# Altium PCB InputBoard_Analog+Digital.PcbDoc
Units mm, origin at the board's own origin, x right, y up, seen from the top; angles counter-clockwise.
Board outline 44 x 44 mm, 2 copper layers (Top Layer, Bottom Layer), stack 1.571 mm thick; 54 components, 45 nets, 200 pads, 44 vias.
Unrouted connection lines stored in the file: 12.
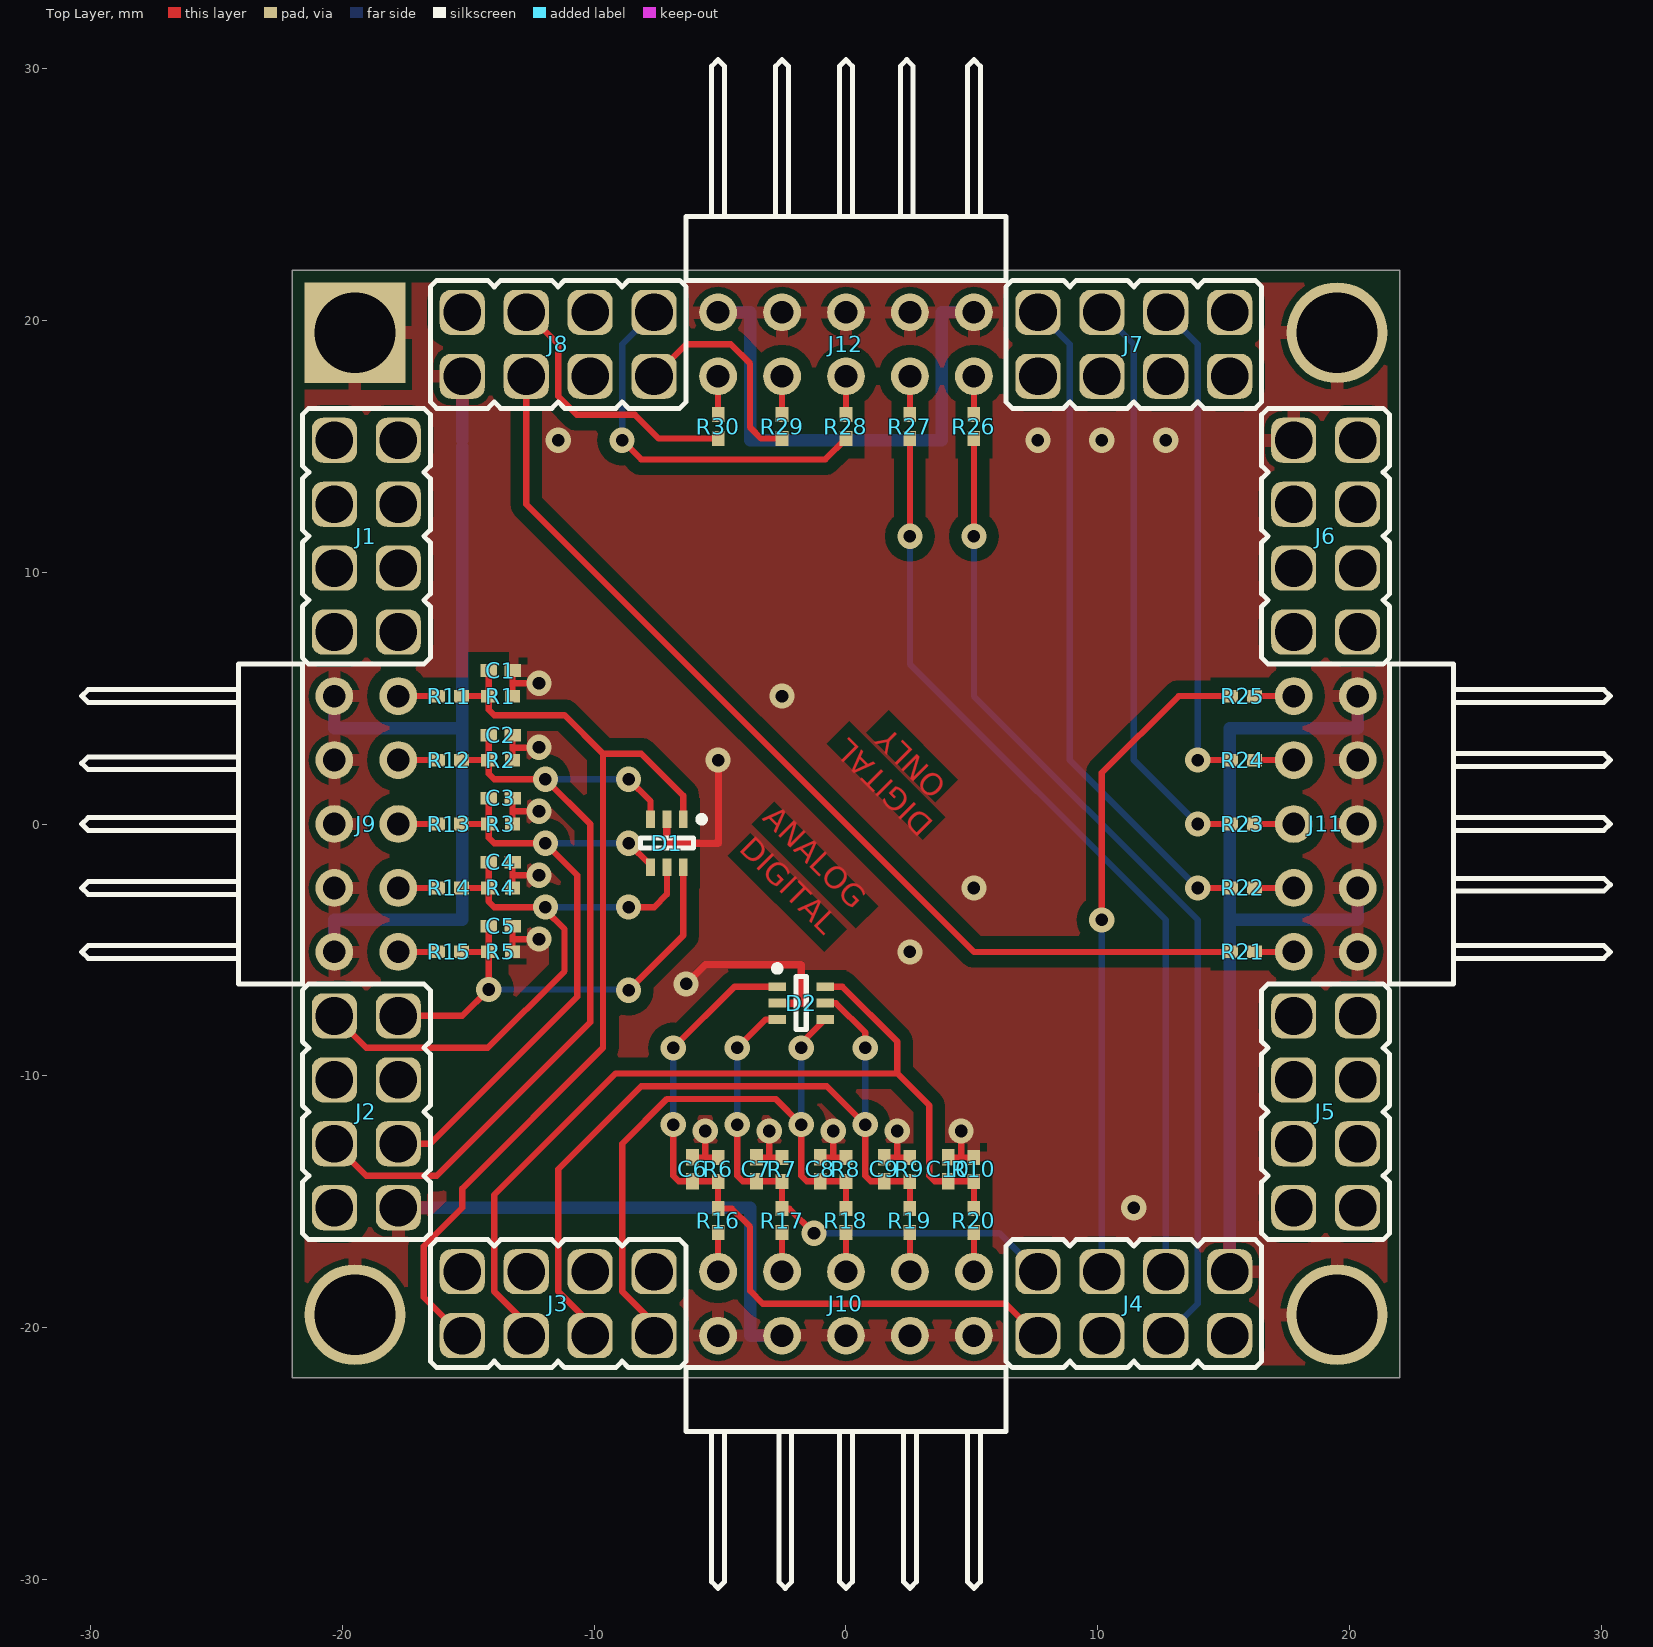
[diagram p0: Top Layer view]
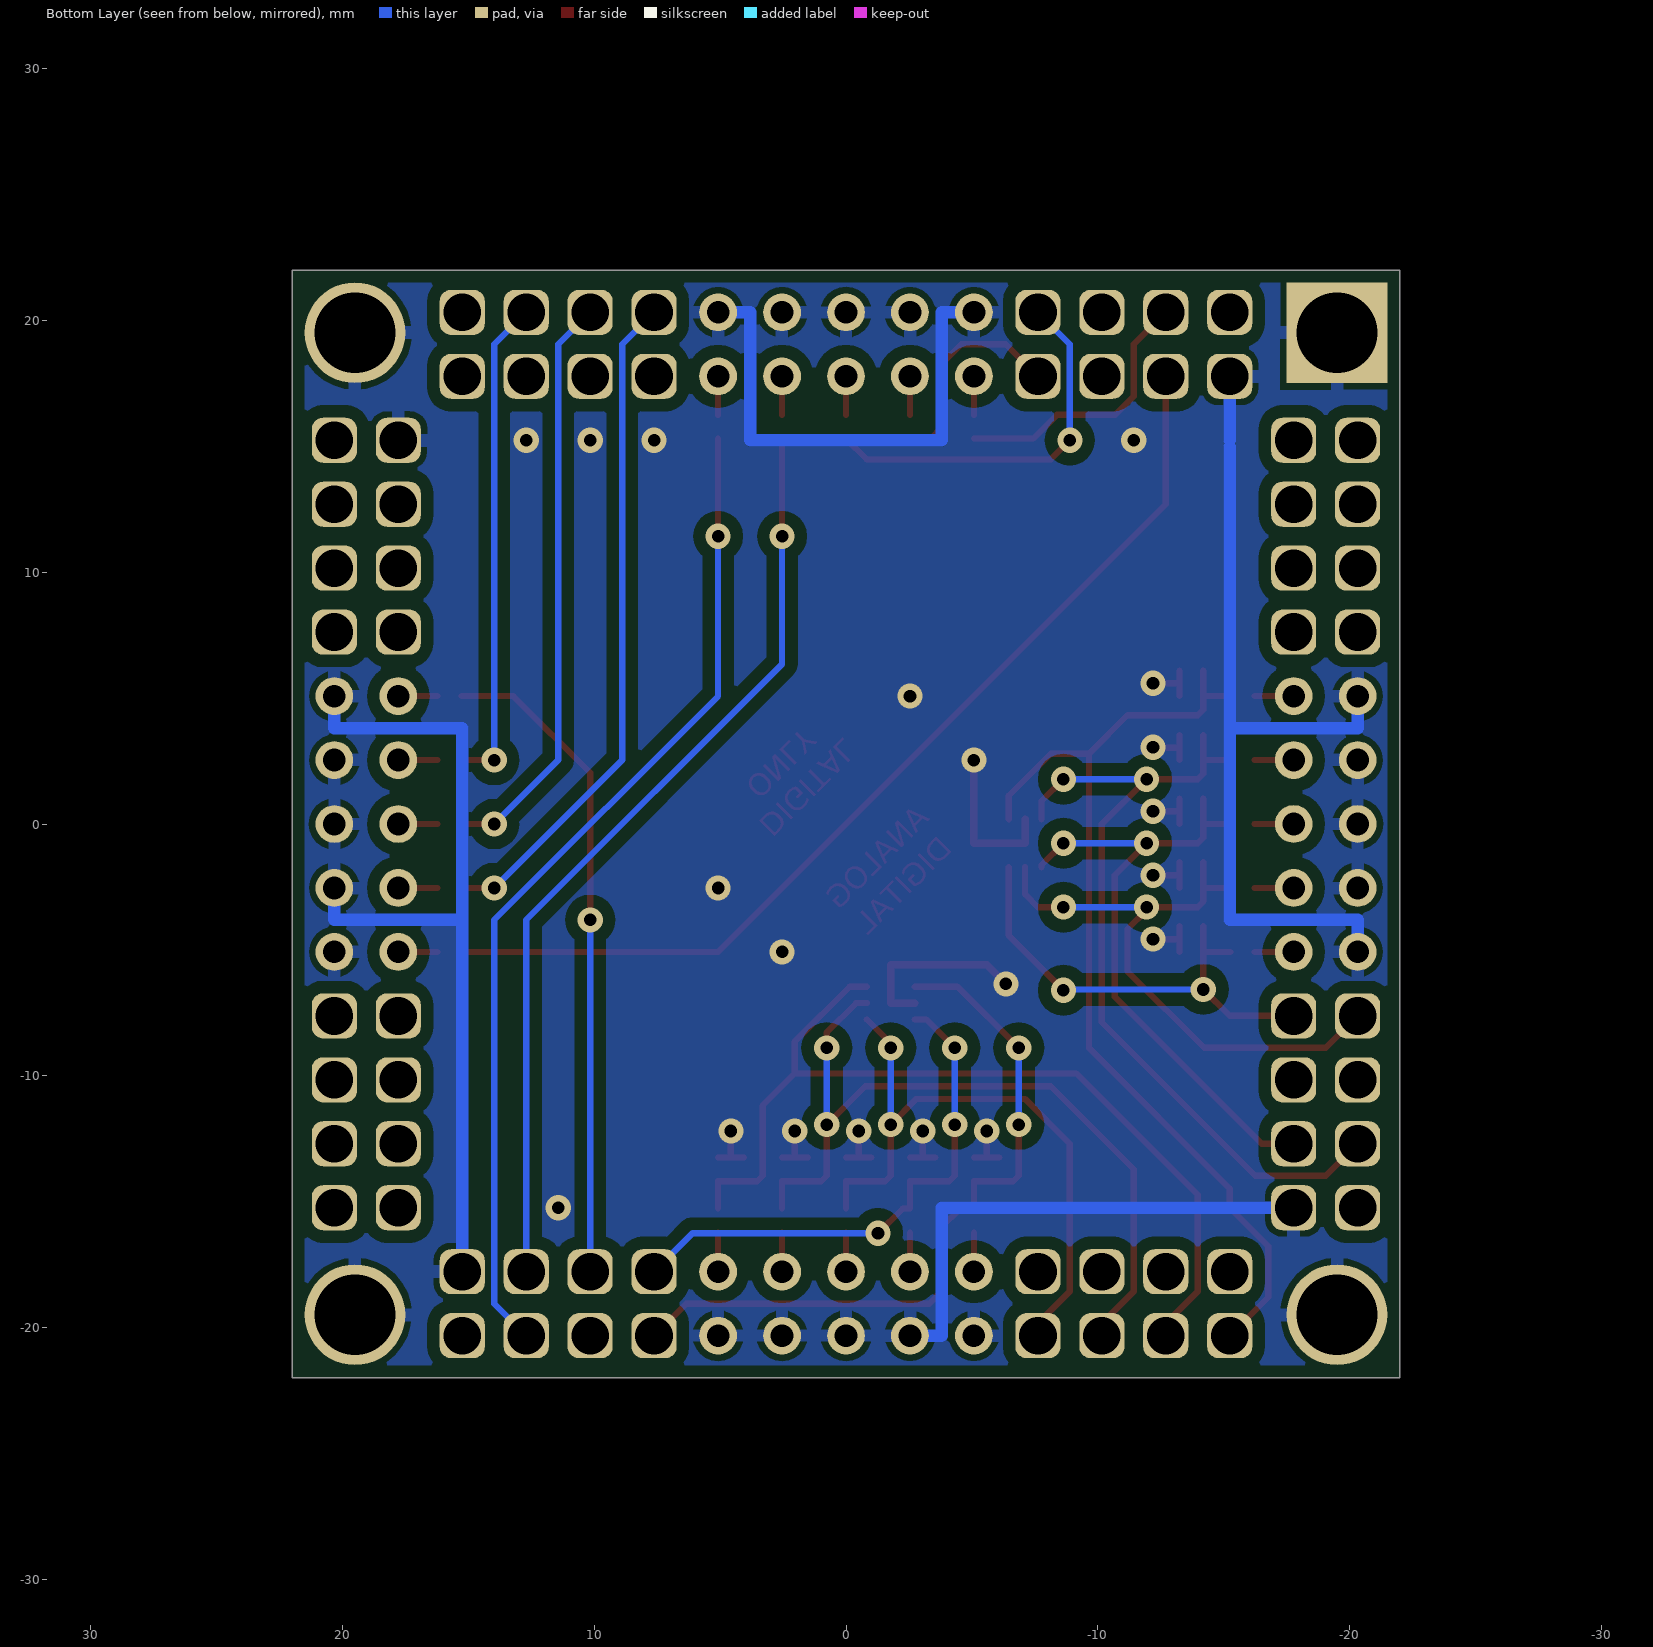
[diagram p1: Bottom Layer view, seen from below]

## Layer stack, top to bottom
Top Solder: solder mask 0.0102, Solder Resist, Dk 3.5
Top Layer: signal copper 0.0356
Dielectric 1: dielectric 1.5, FR-4, Dk 4.8
Bottom Layer: signal copper 0.0356
Bottom Solder: solder mask 0.0102, Solder Resist, Dk 3.5

## Board outline
-22,-22 -22,22 22,22 22,-22

## Design rules (kind name [scope] priority, off if disabled: settings)
Clearance Clearance_Text_Polygon(GND) [InPolygon and InNet('GND') vs IsText] p1: gap=0
Clearance Clearance_Track(GND)_Polygon(GND) [InPolygon and InNet('GND') vs IsTrack and InNet('GND')] p2: gap=0
Clearance Clearance_All_Polygon(GND) [InPolygon and InNet('GND')] p3: gap=0.5
Clearance [All] p4: gap=0.25
HoleSize [All] p1: absolutevalues=TRUE maxlimit=4 minlimit=0.3 maxpercent=80.000 minpercent=20.000
PolygonConnect PolygonConnect_Via(GND) [InNet('GND') vs IsVia] p1: connectstyle=Direct reliefconductorwidth=0.254 reliefentries=4 polygonreliefangle="90 Angle" airgapwidth=0.254
PolygonConnect [All] p2: connectstyle=Relief reliefconductorwidth=0.5 reliefentries=4 polygonreliefangle="90 Angle" airgapwidth=0.254
RoutingVias [All] p1: holewidth=0.5 width=1 viastyle="Through Hole" minholewidth=0.5 minwidth=1 maxholewidth=1.5 maxwidth=2
ShortCircuit ShortCircuit_Text_Polygon(GND) [IsText vs InPolygon and InNet('GND')] p1: allowed=TRUE
ShortCircuit [All] p2: allowed=FALSE
SolderMaskExpansion [All] p1: expansion=0.102
Width [All] p1: maxlimit=2 minlimit=0.25 preferedwidth=0.3
27 further rules are at their usual default settings.

## Components (designator, comment, footprint, x,y, rotation, side; value= is the part's Value field where it differs from the comment)
C1 "0.1/25" CAP0402 -13.716,6.096 r180 top
C2 "0.1/25" CAP0402 -13.716,3.523 r180 top
C3 "0.1/25" CAP0402 -13.716,1.016 r180 top
C4 "0.1/25" CAP0402 -13.716,-1.524 r180 top
C5 "0.1/25" CAP0402 -13.716,-4.064 r180 top
C6 "0.1/25" CAP0402 -6.096,-13.716 r270 top
C7 "0.1/25" CAP0402 -3.556,-13.716 r270 top
C8 "0.1/25" CAP0402 -1.016,-13.716 r270 top
C9 "0.1/25" CAP0402 1.524,-13.716 r270 top
C10 "0.1/25" CAP0402 4.064,-13.716 r270 top
D1 "SMF05C" SOT363 -7.112,-0.762 r270 top
D2 "SMF05C" SOT363 -1.778,-7.112 r0 top
J1 "LEFT" PBDM-8 -19.05,11.43 r270 top
J2 "LEFT" PBDM-8 -19.05,-11.43 r270 top
J3 "BOTTOM" PBDM-8 -11.43,-19.05 r0 top
J4 "BOTTOM" PBDM-8 11.43,-19.05 r0 top
J5 "RIGHT" PBDM-8 19.05,-11.43 r90 top
J6 "RIGHT" PBDM-8 19.05,11.43 r90 top
J7 "TOP" PBDM-8 11.43,19.05 r180 top
J8 "TOP" PBDM-8 -11.43,19.05 r180 top
J9 "PLD-10R" PLD-10R -19.05,0 r270 top
J10 "PLD-10R" PLD-10R 0,-19.05 r0 top
J11 "PLD-10R" PLD-10R 19.05,0 r90 top
J12 "PLD-10R" PLD-10R 0,19.05 r180 top
R1 "10k" RES0402 -13.716,5.08 r0 top
R2 "10k" RES0402 -13.716,2.54 r0 top
R3 "10k" RES0402 -13.716,0 r0 top
R4 "10k" RES0402 -13.716,-2.54 r0 top
R5 "10k" RES0402 -13.716,-5.08 r0 top
R6 "10k" RES0402 -5.08,-13.716 r90 top
R7 "10k" RES0402 -2.54,-13.716 r90 top
R8 "10k" RES0402 0,-13.716 r90 top
R9 "10k" RES0402 2.54,-13.716 r90 top
R10 "10k" RES0402 5.08,-13.716 r90 top
R11 "NC(1k)" RES0402 -15.748,5.08 r180 top
R12 "NC(1k)" RES0402 -15.748,2.54 r180 top
R13 "NC(1k)" RES0402 -15.748,0 r180 top
R14 "NC(1k)" RES0402 -15.748,-2.54 r180 top
R15 "NC(1k)" RES0402 -15.748,-5.08 r180 top
R16 "NC(1k)" RES0402 -5.08,-15.748 r270 top
R17 "NC(1k)" RES0402 -2.54,-15.748 r270 top
R18 "1k" RES0402 0,-15.748 r270 top
R19 "1k" RES0402 2.54,-15.748 r270 top
R20 "1k" RES0402 5.08,-15.748 r270 top
R21 "NC(1k)" RES0402 15.748,-5.08 r0 top
R22 "1k" RES0402 15.748,-2.54 r0 top
R23 "1k" RES0402 15.748,0 r0 top
R24 "1k" RES0402 15.748,2.54 r0 top
R25 "NC(1k)" RES0402 15.748,5.08 r0 top
R26 "NC(1k)" RES0402 5.08,15.781 r90 top
R27 "NC(1k)" RES0402 2.54,15.781 r90 top
R28 "NC(1k)" RES0402 0,15.781 r90 top
R29 "NC(1k)" RES0402 -2.54,15.781 r90 top
R30 "NC(1k)" RES0402 -5.08,15.781 r90 top

## Footprints (in the part's own frame and the unit in brackets; to place one, negate y for a bottom-side part, rotate by r counter-clockwise, add the part's x,y. Pads: shape width x height; smd on the part's side, far side on the other; paste and mask are expansions set on the pad)
CAP0402 [mm]
  rect 0.65x0.5 smd: 1(-0.475,0) 2(0.475,0)
  body extent -0.55,-0.3 0.55,0.3, height 0.5
PBDM-8 [mm] "5-pin interboard connector, pitch 2.54 mm"
  rrect50% 1.79x1.79 hole 1.5: 1(-3.81,-1.27) 2(-3.81,1.27) 3(-1.27,-1.27) 4(-1.27,1.27) 5(1.27,-1.27) 6(1.27,1.27) 7(3.81,-1.27) 8(3.81,1.27)
  silkscreen extent -5.08,-2.54 5.08,2.54, body extent -5.08,-2.54 5.08,2.54, height 3
PLD-10R [mm] "10-pin dual row (2x5) angle interboard connector, pitch 2.54 mm"
  round 1.5 hole 0.9: 1(-5.08,-1.27) 2(-5.08,1.27) 3(-2.54,-1.27) 4(-2.54,1.27) 5(0,-1.27) 6(0,1.27) 7(2.54,-1.27) 8(2.54,1.27) 9(5.08,-1.27) 10(5.08,1.27)
  silkscreen extent -6.35,-11.3 6.35,-2.54, body extent -6.35,-11.19 6.35,1.65, height 5.08
RES0402 [mm]
  rect 0.6x0.5 smd: 1(-0.475,0) 2(0.475,0)
  body extent -0.53,-0.28 0.53,0.28, height 0.35
SOT363 [mm] "SOT363 also known as SC-70 6L, SC-88"
  rect 0.7x0.35 smd: 1(-0.95,0.65) 2(-0.95,0) 3(-0.95,-0.65) 4(0.95,-0.65) 5(0.95,0) 6(0.95,0.65)
  silkscreen extent -1.07,-1.05 0.2,1.5, body extent -0.67,-1.05 0.67,1.05, height 1.1

## Part data
C1 C2 C3 C4 C5 C6 C7 C8 C9 C10: library part CAP0402, "Ceramic chip capacitor 0402"
D1 D2: "5-line TVS Array for ESD and Latch-Up Protection"
J1 J2 J3 J4 J5 J6 J7 J8: library part PBDM-8, "2x4-pin header, pitch 2.54 mm"
J9 J10 J11 J12: "2x5-pin angle header, pitch 2.54 mm"
R1 R2 R3 R4 R5 R6 R7 R8 R9 R10 R11 R12 R13 R14 R15 R16 R17 R18 R19 R20 R21 R22 R23 R24 R25 R26 R27 R28 R29 R30: library part RES0402, "Ceramic chip resistor"

## Free pads (board coordinates)
  round 4 hole 3.2: 0(-19.5,-19.491) 0(19.5,-19.491) 0(19.5,19.509)
  rect 4x4 hole 3.2: 0(-19.5,19.509)

## Via types
v1: diameter 1, hole 0.5, Top Layer to Bottom Layer, 44 vias

## Nets (pads, with @x,y where several pads share a name; then routed paths per layer and width w, separated by ;. In a path a pad name is that pad's centre, name@x,y a point inside that pad or via, vN(x,y) a via of type N, cw(c..) or ccw(c..) an arc to the next point about the centre after c; other vN are vias at no path point)
+5V: J1.6 J3.6 J5.6 J7.6
+12V: J1.2 J3.2 J5.2 J7.2
GND: C1.1 C2.1 C3.1 C4.1 C5.1 C6.1 C7.1 C8.1 C9.1 C10.1 D1.2 D2.2 J2.8 J4.8 J6.8 J8.8 J9.1 J9.3 J9.5 J9.7 J9.9 J10.1 J10.3 J10.5 J10.7 J10.9 J11.1 J11.3 J11.5 J11.7 J11.9 J12.1 J12.3 J12.5 J12.7 J12.9 pad.0 R1.2 R2.2 R3.2 R4.2 R5.2 R6.2 R7.2 R8.2 R9.2 R10.2 | length 143.2
  Top Layer w0.25: R5.2 -13.241,-4.572 ; C5.1 -13.241,-4.572 ; R4.2 -13.241,-2.032 ; C4.1 -13.241,-2.032 ; R3.2 -13.241,0.508 ; C3.1 -13.241,0.508 ; R2.2 -13.241,3.032 ; C2.1 -13.241,3.032 ; R1.2 -13.241,5.588 ; C1.1 -13.241,5.588 ; v1(-12.192,-4.572) -13.241,-4.572 ; v1(-12.192,-2.032) -13.241,-2.032 ; v1(-12.192,0.508) -13.241,0.508 ; v1(-12.192,3.048) -12.208,3.032 -13.241,3.032 ; v1(-12.192,5.588) -13.241,5.588 ; C6.1 -5.588,-13.241 ; v1(-5.588,-12.192) -5.588,-13.241 ; R6.2 -5.588,-13.241 ; C7.1 -3.048,-13.241 ; v1(-3.048,-12.192) -3.048,-13.241 ; R7.2 -3.048,-13.241 ; C8.1 -0.508,-13.241 ; v1(-0.508,-12.192) -0.508,-13.241 ; R8.2 -0.508,-13.241 ; C9.1 2.032,-13.241 ; v1(2.032,-12.192) 2.032,-13.241 ; R9.2 2.032,-13.241 ; C10.1 4.572,-13.241 ; v1(4.572,-12.192) 4.572,-13.241 ; R10.2 4.572,-13.241
  Top Layer w0.3: D1.2 -7.112,-0.762 -5.08,-0.762 v1(-5.08,2.54) ; v1(-6.35,-6.35) -5.588,-5.588 -1.778,-5.588 -1.778,-7.112 D2.2
  Bottom Layer w0.5: J9.9 -20.32,-3.81 -15.24,-3.81 -15.24,3.81 ; J9.1 -20.32,3.81 -15.24,3.81 ; J2.8 -3.81,-15.24 -3.81,-20.32 J10.3 ; -15.24,14.986 -15.24,3.81 ; -15.24,15.24 J8.8 ; J12.9 -3.81,20.32 ; -3.81,20.32 -3.81,15.24 3.81,15.24 3.81,20.32 J12.1 ; J4.8 15.24,-3.81 ; J11.3 20.32,-3.81 15.24,-3.81 ; 20.32,3.81 15.24,3.81 15.24,-3.81 ; 20.32,3.81 J11.9
  other v1: 11.43,-15.24 2.54,-5.08 5.08,-2.54 -2.54,5.08 -11.43,15.24 7.62,15.24 10.16,15.24 12.7,15.24
NetJ9_2: J9.2 R11.2 | length 1.6
  Top Layer w0.25: J9.2 R11.2
NetJ9_4: J9.4 R12.2 | length 1.6
  Top Layer w0.25: J9.4 R12.2
NetJ9_6: J9.6 R13.2 | length 1.6
  Top Layer w0.25: J9.6 R13.2
NetJ9_8: J9.8 R14.2 | length 1.6
  Top Layer w0.25: J9.8 R14.2
NetJ9_10: J9.10 R15.2 | length 1.6
  Top Layer w0.25: J9.10 R15.2
NetJ10_2: J10.2 R16.2 | length 1.6
  Top Layer w0.25: J10.2 R16.2
NetJ10_4: J10.4 R17.2 | length 1.6
  Top Layer w0.25: J10.4 R17.2
NetJ10_6: J10.6 R18.2 | length 1.6
  Top Layer w0.25: J10.6 R18.2
NetJ10_8: J10.8 R19.2 | length 1.6
  Top Layer w0.25: J10.8 R19.2
NetJ10_10: J10.10 R20.2 | length 1.6
  Top Layer w0.25: J10.10 R20.2
NetJ11_2: J11.2 R21.2 | length 1.6
  Top Layer w0.25: R21.2 J11.2
NetJ11_4: J11.4 R22.2 | length 1.6
  Top Layer w0.25: R22.2 J11.4
NetJ11_6: J11.6 R23.2 | length 1.6
  Top Layer w0.25: R23.2 J11.6
NetJ11_8: J11.8 R24.2 | length 1.6
  Top Layer w0.25: R24.2 J11.8
NetJ11_10: J11.10 R25.2 | length 1.6
  Top Layer w0.25: R25.2 J11.10
NetJ12_2: J12.2 R26.2 | length 1.5
  Top Layer w0.25: R26.2 J12.2
NetJ12_4: J12.4 R27.2 | length 1.5
  Top Layer w0.25: R27.2 J12.4
NetJ12_6: J12.6 R28.2 | length 1.5
  Top Layer w0.25: R28.2 J12.6
NetJ12_8: J12.8 R29.2 | length 1.5
  Top Layer w0.25: R29.2 J12.8
NetJ12_10: J12.10 R30.2 | length 1.5
  Top Layer w0.25: R30.2 J12.10
PA0/ADC12_IN0: C5.2 D1.6 J2.2 R5.1 R15.1 | length 19
  Top Layer w0.25: J2.2 -15.24,-7.62 v1(-14.191,-6.571) R5.1 ; R15.1 R5.1 ; C5.2 R5.1 ; v1(-8.636,-6.604) -6.462,-4.43 D1.6
  Bottom Layer w0.25: v1(-14.191,-6.571) -8.669,-6.571 v1(-8.636,-6.604)
PA1/ADC12_IN1: C4.2 D1.5 J2.1 R4.1 R14.1 | length 24.9
  Top Layer w0.25: J2.1 -19.05,-8.89 -14.224,-8.89 -11.176,-5.842 -11.176,-4.176 -11.938,-3.414 v1(-11.938,-3.302) -13.97,-3.302 -14.191,-3.081 R4.1 ; R14.1 R4.1 ; C4.2 R4.1 ; v1(-8.636,-3.302) -7.62,-3.302 -7.112,-2.794 D1.5
  Bottom Layer w0.25: v1(-11.938,-3.302) v1(-8.636,-3.302)
PA2/ADC12_IN2: C3.2 D1.4 J2.6 R3.1 R13.1 | length 25.8
  Top Layer w0.25: J2.6 -16.51,-12.7 -10.668,-6.858 -10.668,-2.032 v1(-11.938,-0.762) -13.97,-0.762 -14.191,-0.541 R3.1 ; R13.1 R3.1 ; C3.2 R3.1 ; v1(-8.636,-0.762) -7.762,-1.636 D1.4
  Bottom Layer w0.25: v1(-11.938,-0.762) v1(-8.636,-0.762)
PA3/ADC12_IN3: C2.2 D1.3 J2.5 R2.1 R12.1 | length 33.8
  Top Layer w0.25: J2.5 -19.05,-13.97 -16.256,-13.97 -10.16,-7.874 -10.16,0 v1(-11.938,1.778) -13.97,1.778 -14.191,1.999 R2.1 ; R12.1 R2.1 ; C2.2 R2.1 ; v1(-8.636,1.778) -7.762,0.904 D1.3
  Bottom Layer w0.25: v1(-11.938,1.778) v1(-8.636,1.778)
PA4/ADC12_IN4: C1.2 D1.1 J3.1 R1.1 R11.1 | length 39.4
  Top Layer w0.25: R11.1 R1.1 ; J3.1 -16.764,-18.796 -16.764,-16.764 -15.24,-15.24 -15.24,-14.478 -9.652,-8.89 -9.652,2.794 ; C1.2 R1.1 ; D1.1 -6.462,1.128 -8.128,2.794 -9.652,2.794 ; R1.1 -14.191,4.539 -13.97,4.318 -11.176,4.318 -9.652,2.794
PA5/ADC12_IN5: C10.2 D2.6 J3.3 R10.1 R20.1 | length 36.7
  Top Layer w0.25: J3.3 -12.7,-19.838 -13.97,-18.568 -13.97,-14.732 -9.144,-9.906 2.032,-9.906 ; D2.6 -0.142,-6.462 2.032,-8.636 2.032,-9.906 ; R20.1 R10.1 C10.2 3.523,-14.191 3.302,-13.97 3.302,-11.176 2.032,-9.906
PA6/ADC12_IN6: C9.2 D2.5 J3.5 R9.1 R19.1 | length 32
  Top Layer w0.25: J3.5 -10.16,-19.838 -11.43,-18.568 -11.43,-13.716 -8.128,-10.414 -0.762,-10.414 v1(0.762,-11.938) 0.762,-13.97 0.983,-14.191 C9.2 R9.1 R19.1 ; D2.5 -0.403,-7.112 0.762,-8.277 v1(0.762,-8.89)
  Bottom Layer w0.25: v1(0.762,-11.938) v1(0.762,-8.89)
PA7/ADC12_IN7: C8.2 D2.4 J3.7 R8.1 R18.1 | length 26
  Top Layer w0.25: J3.7 -7.62,-19.838 -8.89,-18.568 -8.89,-12.7 -7.112,-10.922 -2.794,-10.922 v1(-1.778,-11.938) -1.778,-13.97 -1.557,-14.191 C8.2 R8.1 R18.1 ; v1(-1.778,-8.89) -1.778,-8.712 D2.4
  Bottom Layer w0.25: v1(-1.778,-11.938) v1(-1.778,-8.89)
PB0/ADC12_IN8: C7.2 D2.3 J4.2 R7.1 R17.1 | length 21.3
  Top Layer w0.25: v1(-4.318,-11.938) -4.318,-13.97 -4.097,-14.191 C7.2 R7.1 R17.1 -2.253,-15.273 v1(-1.27,-16.256) ; v1(-4.318,-8.89) -3.19,-7.762 D2.3
  Bottom Layer w0.25: v1(-4.318,-11.938) v1(-4.318,-8.89) ; v1(-1.27,-16.256) 6.096,-16.256 J4.2
PB1/ADC12_IN9: C6.2 D2.1 J4.1 R6.1 R16.1 | length 29.4
  Top Layer w0.25: v1(-6.858,-11.938) -6.858,-13.97 -6.637,-14.191 C6.2 R6.1 R16.1 -4.539,-15.273 -3.81,-16.002 -3.81,-18.542 -3.302,-19.05 6.35,-19.05 J4.1 ; v1(-6.858,-8.89) -4.43,-6.462 D2.1
  Bottom Layer w0.25: v1(-6.858,-11.938) v1(-6.858,-8.89)
PB2: J4.4 R25.1 | length 26.2
  Top Layer w0.25: v1(10.16,-3.81) 10.16,2.032 13.208,5.08 R25.1
  Bottom Layer w0.25: J4.4 v1(10.16,-3.81)
PB3: J7.3 R24.1 | length 19.6
  Top Layer w0.25: v1(13.97,2.54) R24.1
  Bottom Layer w0.25: J7.3 13.97,19.05 v1(13.97,2.54)
PB4: J7.5 R23.1 | length 23.2
  Top Layer w0.25: v1(13.97,0) R23.1
  Bottom Layer w0.25: J7.5 11.43,19.05 11.43,2.54 v1(13.97,0)
PB5: J7.7 R22.1 | length 26.8
  Top Layer w0.25: v1(13.97,-2.54) R22.1
  Bottom Layer w0.25: J7.7 8.89,19.05 8.89,2.54 v1(13.97,-2.54)
PB6: J8.6 R21.1 | length 40.4
  Top Layer w0.25: J8.6 -12.7,12.7 5.08,-5.08 R21.1
PB7: J8.5 R30.1 | length 10.9
  Top Layer w0.25: J8.5 -11.43,19.05 -11.43,16.992 -10.694,16.256 -8.382,16.256 -7.432,15.306 R30.1
PB8: J8.2 R29.1 | length 8.6
  Top Layer w0.25: J8.2 -6.35,19.05 -4.572,19.05 -3.81,18.288 -3.81,15.748 -3.368,15.306 R29.1
PB9: J8.1 R28.1 | length 15.2
  Top Layer w0.25: v1(-8.89,15.24) -8.128,14.478 -0.828,14.478 R28.1
  Bottom Layer w0.25: v1(-8.89,15.24) -8.89,19.05 J8.1
PB10: J4.6 R27.1 | length 37.3
  Top Layer w0.25: v1(2.54,11.43) R27.1
  Bottom Layer w0.25: v1(2.54,11.43) 2.54,6.35 12.7,-3.81 J4.6
PB11: J4.5 R26.1 | length 39.8
  Top Layer w0.25: v1(5.08,11.43) R26.1
  Bottom Layer w0.25: v1(5.08,11.43) 5.08,5.08 13.97,-3.81 13.97,-19.05 J4.5
VBAT: J1.4 J3.4 J5.4 J7.4
VCC: J1.8 J3.8 J5.8 J7.8
pads on no net: J1.1 J1.3 J1.5 J1.7 J2.3 J2.4 J2.7 J4.3 J4.7 J5.1 J5.3 J5.5 J5.7 J6.1 J6.2 J6.3 J6.4 J6.5 J6.6 J6.7 J7.1 J8.3 J8.4 J8.7

## Polygon pours and split planes (outlines as drawn)
GND on Top Layer "Top-GND" (solid, remove dead copper, pour order 4): -21.5,21.5 21.5,21.5 21.5,-21.5 -21.5,-21.5
GND on Bottom Layer "Bottom-GND" (solid, remove dead copper, pour order 3): -21.5,21.5 21.5,21.5 21.5,-21.5 -21.5,-21.5

## Other copper
Top Layer:
  text "ONLY" at 4.25,1.75 h1.52 r135
  text "DIGITAL" at 3.75,0.25 h1.52 r135
  text "ANALOG" at -3.556,0 h1.52 r315
  text "DIGITAL" at -4.5,-1.25 h1.52 r315

## Silkscreen, mask and mechanical layers (free items; w line width, h text height)
Board:
  the board outline again, w0.2